# EAGLE board blink1mk3_card1-test (EAGLE 9.0.1)
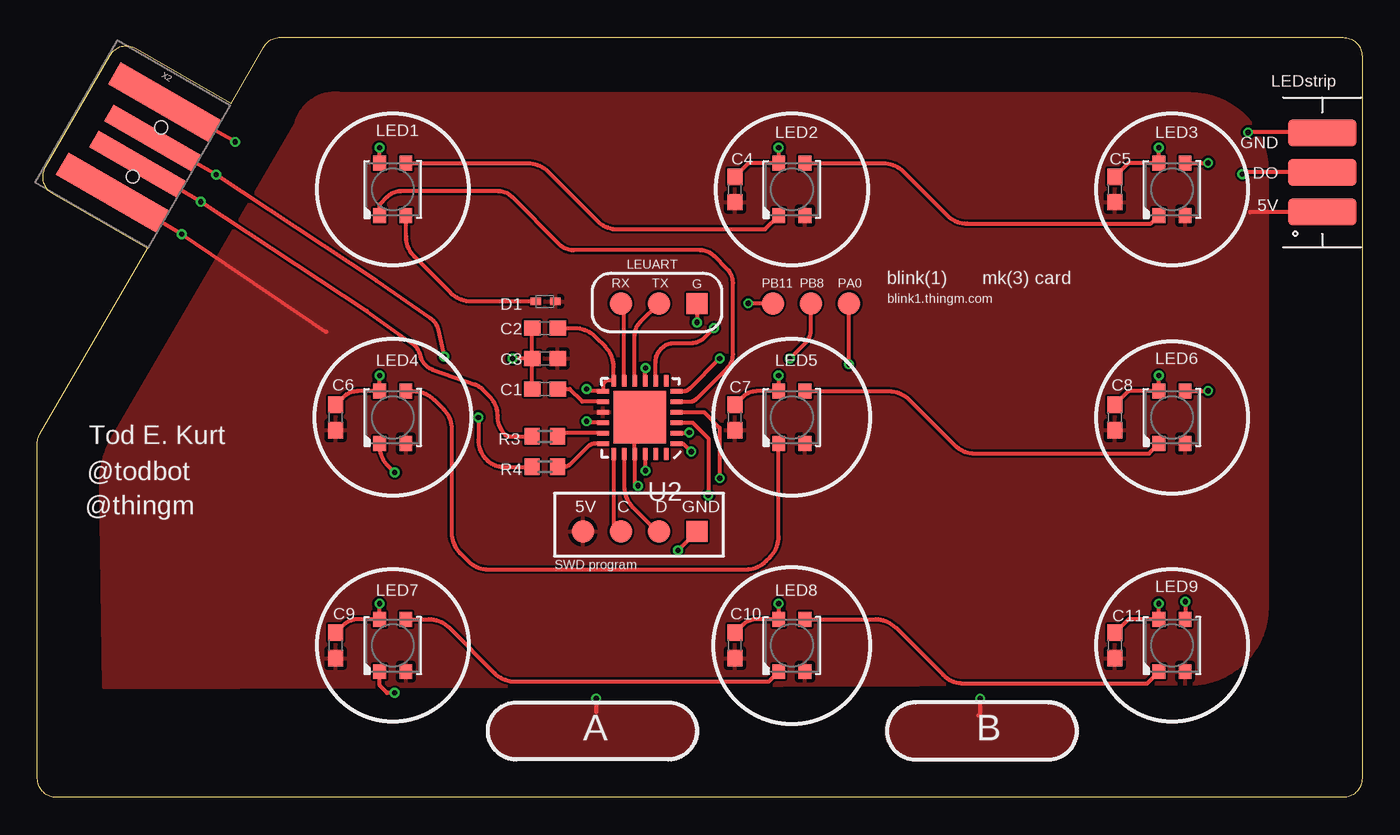
[diagram p0: board, top side]
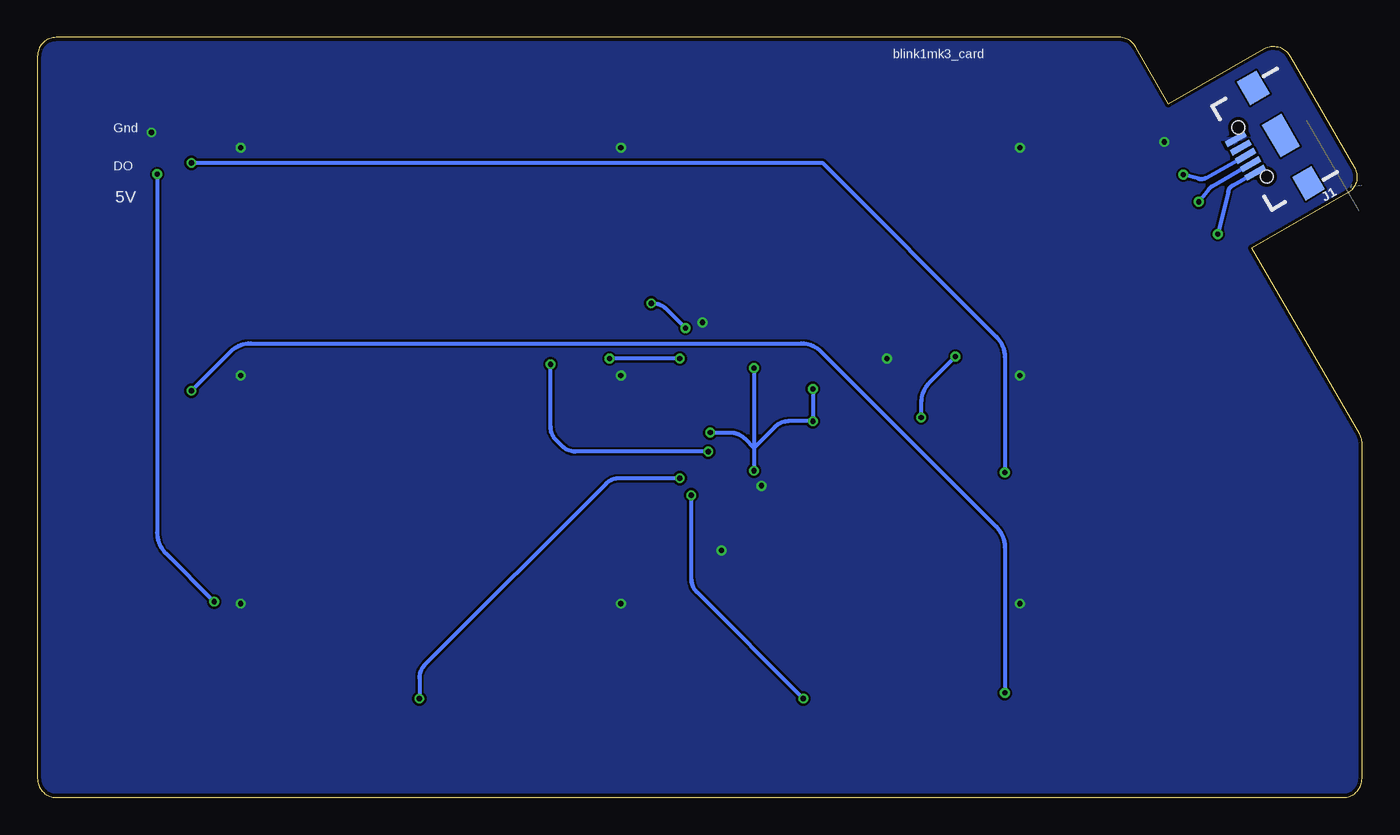
[diagram p1: board, bottom side, seen from below]

Size 88.52 x 50.8 mm. Coordinates in mm from the lower left corner, seen from the top.
Outline: 12.95,46.35 15.13,50.16 arc-60 16.23,50.8 87.25,50.8 arc-90 88.52,49.53 88.52,1.27 arc-90 87.25,0 1.27,0 arc-90 0,1.27 0,23.66 arc-30 0.17,24.3 7.37,36.7 0.98,40.39 arc-90 0.51,42.12 4.83,49.58 arc-90 6.56,50.04 12.95,46.35
Copper layers (1*16): Top 0.035mm / dielectric 1.5mm / Bottom 0.035mm
Design rules "SeeedStudio_2layer_DRU_no_angle_20140221": minimum track width 6mil, minimum drill 12mil, track to track 6mil, track to pad 6mil, pad to pad 6mil, via to via 6mil, smd to smd 0mil, copper to edge 10mil, drill to drill 10mil, minimum pad ring 10mil, minimum via ring 6mil, stop-mask expansion 2mil, vias tented up to drill 100mil, thermal gap 10mil

## Footprints (pad centres in the part's own frame; a part is rotated, then mirrored left to right if it is on the bottom)
TP15R = smd 1.5 x 1.5: TP 0,0
C0603 = smd 1.1 x 1: 1 -0.85,0; 2 0.85,0
SOD523 = smd 0.7 x 0.5: A 0.7,0; C -0.6,0
TP14SQ = smd 1.4 x 1.4: TP 0,0
USB-B-MICRO-SMD = smd 1.45 x 0.4: D+ 2.725,0; D- 2.725,0.65; GND 2.725,-1.3; ID 2.725,-0.65; VBUS 2.725,1.3 | smd 1.5 x 1.8: SHIELD1 0,3.685; SHIELD2 0,-3.685 | smd 1.5 x 2.5: SHIELD3 0,0 | hole 0.85: 2.2,1.9; 2.2,-1.9
LED3535 = smd 1 x 0.85: 1 -1.75,0.875; 2 -1.75,-0.875; 3 1.75,-0.875; 4 1.75,0.875
R0603 = smd 1 x 1.1: 1 -0.85,0; 2 0.85,0
QFN24PAD = smd 0.8 x 0.3: 1 -2.45,1.75; 2 -2.45,1.05; 3 -2.45,0.35; 4 -2.45,-0.35; 5 -2.45,-1.05; 6 -2.45,-1.75; 13 2.45,-1.75; 14 2.45,-1.05; 15 2.45,-0.35; 16 2.45,0.35; 17 2.45,1.05; 18 2.45,1.75 | smd 0.3 x 0.8: 7 -1.75,-2.45; 8 -1.05,-2.45; 9 -0.35,-2.45; 10 0.35,-2.45; 11 1.05,-2.45; 12 1.75,-2.45; 19 1.75,2.45; 20 1.05,2.45; 21 0.35,2.45; 22 -0.35,2.45; 23 -1.05,2.45; 24 -1.75,2.45 | smd 3.5 x 3.5: PAD 0,0
LEDSTRIP-3P = smd 4.6 x 1.8: A 0,-2.65; B 0,0; C 0,2.63
USB-A-PCB-2 = smd 7.75 x 1.69: 5V -1.47,-3.5; GND -1.47,3.5 | smd 6.75 x 1.3: USB_M -0.97,-1; USB_P -0.97,1

## Placement (x,y rotation side)
5V  TPTP15R  [TP15R]  36.45,17.78 0 top
C  TPTP15R  [TP15R]  38.99,17.78 0 top
C1  1uF  [C0603]  33.91,27.3 180 top
C2  1uF  [C0603]  33.91,31.37 180 top
C3  4.7uF  [C0603]  33.91,29.34 180 top
C4  0.1uF  [C0603]  46.61,40.64 90 top
C5  0.1uF  [C0603]  72.01,40.64 90 top
C6  0.1uF  [C0603]  19.94,25.4 90 top
C7  0.1uF  [C0603]  46.61,25.4 90 top
C8  0.1uF  [C0603]  72.01,25.4 90 top
C9  0.1uF  [C0603]  19.94,10.16 90 top
C10  0.1uF  [C0603]  46.61,10.16 90 top
C11  0.1uF  [C0603]  72.01,10.16 90 top
D  TPTP15R  [TP15R]  41.53,17.78 0 top
D1  1N1418  [SOD523]  33.91,33.15 0 top
G  TPTP14SQ  [TP14SQ]  44.07,33.02 0 top
GND  TPTP14SQ  [TP14SQ]  44.07,17.78 0 top
J1  NONPOP  [USB-B-MICRO-SMD]  5.42,44.24 210 bottom
LED1  SK6812MINI  [LED3535]  23.75,40.64 90 top
LED2  SK6812MINI  [LED3535]  50.42,40.64 90 top
LED3  SK6812MINI  [LED3535]  75.82,40.64 90 top
LED4  SK6812MINI  [LED3535]  23.75,25.4 90 top
LED5  SK6812MINI  [LED3535]  50.42,25.4 90 top
LED6  SK6812MINI  [LED3535]  75.82,25.4 90 top
LED7  SK6812MINI  [LED3535]  23.75,10.16 90 top
LED8  SK6812MINI  [LED3535]  50.42,10.16 90 top
LED9  SK6812MINI  [LED3535]  75.82,10.16 90 top
PA0  TPTP15R  [TP15R]  54.23,33.02 0 top
PB8  TPTP15R  [TP15R]  51.69,33.02 0 top
PB11  TPTP15R  [TP15R]  49.15,33.02 0 top
R3  15  [R0603]  33.91,24.13 180 top
R4  15  [R0603]  33.91,22.1 180 top
RX  TPTP15R  [TP15R]  38.99,33.02 0 top
TX  TPTP15R  [TP15R]  41.53,33.02 180 top
U2  EFM32HG309F64G  [QFN24PAD]  40.26,25.4 180 top
U$1  LED_STRIP_3P  [LEDSTRIP-3P]  85.85,41.78 0 top
X2  USBPCB2  [USB-A-PCB-2]  8.04,42.71 330 top

## Library data of the parts
5V C D G GND PA0 PB8 PB11 RX TX = testpad
C1-C11 LED1-LED9 R3 R4 = adafruit
D1 = diode
J1 = SparkFun-Connectors; PROD_ID: CONN-11752
U2 X2 = todstuff
U$1 = NeoJoints

## Nets
+3V3: C2.1 U2.2 U2.9 U2.12 U2.13 U2.16 U2.22
+5V: 5V.TP C3.1 C4.1 C5.1 C6.1 C7.1 C8.1 C9.1 C10.1 C11.1 D1.A J1.VBUS LED2.2 LED3.2 LED4.2 LED5.2 LED6.2 LED7.2 LED8.2 LED9.2 U2.15 U$1.A X2.5V
/RESET: U2.7
CAP0A: U2.3
CAP0B: U2.23
CAP1A: U2.4
CAP1B: U2.24
DBG_SWCLK: C.TP U2.19
DBG_SWDIO: D.TP U2.20
DECOUPLE: C1.1 U2.14
DI: LED1.1 U2.5
DO: LED9.3 U$1.B
GND: C1.2 C2.2 C3.2 C4.2 C5.2 C6.2 C7.2 C8.2 C9.2 C10.2 C11.2 G.TP GND.TP J1.GND LED1.4 LED2.4 LED3.4 LED4.4 LED5.4 LED6.4 LED7.4 LED8.4 LED9.4 U2.21 U2.PAD U$1.C X2.GND
LEUO_RX: RX.TP U2.11
LEUO_TX: TX.TP U2.10
N$2: LED1.3 LED2.1
N$4: LED7.3 LED8.1
N$5: LED4.3 LED5.1
N$6: LED5.3 LED6.1
N$7: LED2.3 LED3.1
N$8: LED3.3 LED4.1
N$9: LED8.3 LED9.1
N$10: LED6.3 LED7.1
PA0: PA0.TP U2.1
PB8: PB8.TP U2.6
PB11: PB11.TP U2.8
RUSB_D+: R4.1 U2.18
RUSB_D-: R3.1 U2.17
USB_D+: J1.D+ R4.2 X2.USB_P
USB_D-: J1.D- R3.2 X2.USB_M
VLEDA: D1.C LED1.2

## Tracks (layer width: path | path; a pad name or v marks a point on that pad's centre or on a via)
+3V3  (via drill 0.35)
  Top 0.254: C2.1 35.91,31.37 arc-45 37.26,30.81 37.95,30.12 arc-45 38.51,28.77 U2.12 38.01,27.85 37.81,27.65 U2.13 36.86,27.15 v36.7,27.3 | U2.22 40.61,21.88 v40.64,21.84 | U2.2 43.53,24.35 v43.56,24.38 | U2.16 36.8,25.05 v36.7,25.15 | U2.9 40.61,28.67 v40.64,28.7
  Bottom 0.254: v43.56,24.38 42.18,24.38 arc45 41.28,24.01 40.64,23.37 | 40.64,23.37 v40.64,21.84 | 40.64,23.37 39.23,24.77 arc45 38.34,25.15 v36.7,25.15 v36.7,27.3 | v40.64,28.7 40.64,23.37
+5V  (via drill 0.35)
  Top 0.254: U$1.A 81.04,39.13 81.03,39.12 | 19.3,31.11 v9.64,37.65 X2.5V
  Bottom 0.254: J1.VBUS 8.65,40.9 arc-47 8.96,40.5 v9.64,37.65
  pour Top: 17.27,44.96 5.09,24.14 arc31 4.22,20.83 4.45,7.37 77.09,7.62 arc90 82.17,12.7 82.17,41.91 arc90 77.09,46.99 20.45,46.99 arc90
CAP0A  (via drill 0.35)
  Top 0.254: U2.3 43.78,25.05 44.83,24 v44.83,20.19 | v37.34,6.6 37.34,5.71
  Bottom 0.254: v44.83,20.19 44.83,14.62 arc-45 44.46,13.72 v37.34,6.6
  pour Top: 32,6.35 42.16,6.35 arc-90 44.07,4.45 arc-90 42.16,2.54 32,2.54 arc-90 30.1,4.45 arc-90
CAP1A  (via drill 0.35)
  Top 0.254: U2.4 44.55,25.75 45.59,24.7 v45.59,21.34 | v62.99,6.6 62.99,5.59 62.87,5.46
  Bottom 0.254: v45.59,21.34 49.64,21.34 arc-45 50.54,20.96 62.62,8.88 arc-45 62.99,7.98 v62.99,6.6
  pour Top: 58.67,6.35 67.56,6.35 arc-90 69.47,4.45 arc-90 67.56,2.54 58.67,2.54 arc-90 56.77,4.45 arc-90
DBG_SWCLK
  Top 0.254: U2.19 38.51,18.26 C.TP
DBG_SWDIO
  Top 0.254: D.TP 41.4,17.78 39.77,19.41 arc-45 39.21,20.76 U2.20
DECOUPLE
  Top 0.254: C1.1 35.56,27.3 36.42,26.45 U2.14
DI
  Top 0.254: LED1.1 22.87,39.61 22.86,39.62 23.38,40.14 arc-45 24.28,40.51 30.82,40.51 arc-45 31.71,40.14 34.91,36.95 arc45 35.81,36.58 44.3,36.58 arc-45 45.2,36.2 46.11,35.3 arc-45 46.48,34.4 46.48,29.61 arc-45 46.11,28.71 44.04,26.64 arc-45 43.59,26.45 U2.5
DO  (via drill 0.35)
  Top 0.254: v76.71,13.08 76.69,13.07 LED9.3 | U$1.B 80.65,41.78 arc90 v80.52,41.66
  Bottom 0.254: v80.52,41.66 80.52,17.68 arc-45 79.96,16.33 v76.71,13.08
GND  (via drill 0.35)
  Top 0.254: LED1.4 22.87,43.42 v22.86,43.43 | U$1.C arc90 85.81,44.45 v80.9,44.45 | X2.GND v13.21,43.81 | C1.2 C3.2 | C3.2 C2.2 | C3.2 v31.75,29.34 | GND.TP v42.8,16.51 | G.TP v44.07,31.75 | C10.2 47.14,11.54 arc-45 48.04,11.91 LED8.4 49.54,12.94 v49.53,12.95 | C11.2 72.91,11.91 LED9.4 74.94,12.94 v74.93,12.95 | C8.2 72.91,27.15 LED6.4 74.94,28.18 v74.93,28.19 | C5.2 72.91,42.39 LED3.4 74.94,43.42 v74.93,43.43 | C9.2 20.47,11.54 arc-45 21.37,11.91 LED7.4 22.87,12.94 v22.86,12.95 | C6.2 20.47,26.78 arc-45 21.37,27.15 LED4.4 22.87,28.18 v22.86,28.19 | C4.2 47.51,42.39 LED2.4 49.54,43.42 v49.53,43.43 | C7.2 47.14,26.78 arc-45 48.04,27.15 LED5.4 49.54,28.18 v49.53,28.19 | v40.13,20.83 39.91,21.05 U2.21 39.91,25.05 U2.PAD
  pour Bottom: 88.52,50.8 -0.38,50.8 -0.38,0 88.52,0
LEUO_RX
  Top 0.254: U2.11 39.21,32.8 RX.TP
LEUO_TX
  Top 0.254: TX.TP 40.28,31.77 arc45 39.91,30.87 U2.10
N$2
  Top 0.254: LED1.3 32.77,42.39 arc-45 34.11,41.83 37.42,38.53 arc45 38.76,37.97 48.63,37.97 LED2.1
N$4
  Top 0.254: LED7.3 26.16,11.91 arc-45 27.51,11.35 30.56,8.3 arc45 31.9,7.75 48.88,7.75 LED8.1
N$5
  Top 0.254: LED4.3 25.15,27.15 arc-45 26.49,26.59 27.13,25.96 arc-45 27.69,24.61 27.69,17.68 arc45 28.24,16.33 28.78,15.8 arc45 30.13,15.24 47.34,15.24 arc45 48.69,15.8 48.97,16.08 arc45 49.53,17.43 49.53,23.64 LED5.1
N$6
  Top 0.254: LED5.3 56.9,27.15 arc-45 58.24,26.59 61.29,23.54 arc45 62.64,22.99 74.28,22.99 LED6.1
N$7
  Top 0.254: LED2.3 56.52,42.39 arc-45 57.86,41.83 60.78,38.91 arc45 62.13,38.35 74.41,38.35 LED3.1
N$8  (via drill 0.35)
  Top 0.254: 76.79,42.29 LED3.3 78.23,42.39 v78.23,42.42 | v23.88,21.72 23.43,22.16 arc-45 22.87,23.51 LED4.1
  Bottom 0.254: v78.23,42.42 74.8,42.42 49.53,42.42 36.07,42.42 24.43,30.78 arc45 23.88,29.44 v23.88,21.72
N$9
  Top 0.254: LED8.3 56.01,11.91 arc-45 57.36,11.35 60.53,8.18 arc45 61.88,7.62 74.15,7.62 LED9.1
N$10  (via drill 0.35)
  Top 0.254: LED6.3 78.2,27.15 v78.23,27.18 | v23.88,6.98 23.37,6.98 22.87,7.48 LED7.1
  Bottom 0.254: v23.88,6.98 23.88,16.74 arc-45 24.43,18.08 36.15,29.79 arc-45 37.49,30.35 74.27,30.35 arc-45 75.62,29.79 v78.23,27.18
PA0  (via drill 0.35)
  Top 0.254: v43.69,23.11 43.15,23.65 U2.1 | v54.23,28.96 PA0.TP
  Bottom 0.254: v43.69,23.11 52.56,23.11 arc45 53.46,23.49 53.86,23.88 arc45 54.23,24.78 v54.23,28.96
PB8  (via drill 0.35)
  Top 0.254: v45.59,29.34 43.59,27.34 arc-45 43.14,27.15 U2.6 | v50.29,29.34 51.32,30.36 arc45 51.69,31.26 PB8.TP
  Bottom 0.254: v45.59,29.34 v50.29,29.34
PB11  (via drill 0.35)
  Top 0.254: PB11.TP v47.5,33.02 | v45.21,31.37 44.57,30.72 arc-45 43.67,30.35 42.54,30.35 arc45 41.68,30 arc45 41.31,29.1 U2.8
  Bottom 0.254: v47.5,33.02 47.39,33.02 arc45 46.49,32.65 v45.21,31.37
RUSB_D+
  Top 0.254: R4.1 35.17,22.1 arc45 35.62,22.28 36.8,23.46 arc-45 37.25,23.65 U2.18
RUSB_D-
  Top 0.254: 35.02,24.35 34.8,24.13 R3.1 34.98,24.35 U2.17
USB_D+  (via drill 0.35)
  Top 0.254: v29.46,25.4 29.46,23.9 arc45 30.02,22.56 arc45 31.13,22.1 R4.2 | X2.USB_P v11.94,41.62 22.65,34.54 26.26,32.03 arc-43 26.78,31.27 v27.18,29.46
  Bottom 0.254: v27.18,29.46 28.91,27.74 arc-45 29.46,26.39 v29.46,25.4 | J1.D+ 10.44,41.4 arc44 10.92,41.34 v11.94,41.62
USB_D-  (via drill 0.35)
  Top 0.254: R3.2 31.53,24.13 arc-45 31.25,24.24 arc-45 30.73,25.5 arc45 30.18,26.85 29.72,27.31 arc26 29.24,27.6 26.39,28.61 arc-54 25.6,29.45 25.53,29.68 arc38 25.05,30.35 22,32.52 v10.91,39.81 X2.USB_M
  Bottom 0.254: J1.D- 10.05,40.83 arc-22 10.24,40.67 v10.91,39.81
VLEDA
  Top 0.254: D1.C 28.98,33.15 arc-45 27.64,33.7 25.2,36.14 arc-45 24.64,37.49 24.64,38.88 LED1.2

## Text on the board
tPlace: LEDstrip | GND | DO | 5V | LEUART | blink(1) | mk(3) card | blink1.thingm.com | Tod E. Kurt | @todbot | @thingm | SWD program | A | B
bPlace: blink1mk3_card | Gnd | DO | 5V